# Altium PCB Power_Embedded_Board.PcbDoc (part 1 of 3)
Units mil, origin at the board's own origin, x right, y up, seen from the top; angles counter-clockwise.
Board outline 8055 x 2985 mil, 4 copper layers (Top Layer, Ground, Battery Voltage, Bottom Layer), stack 30.634 mil thick; 155 components, 174 nets, 698 pads, 170 vias.
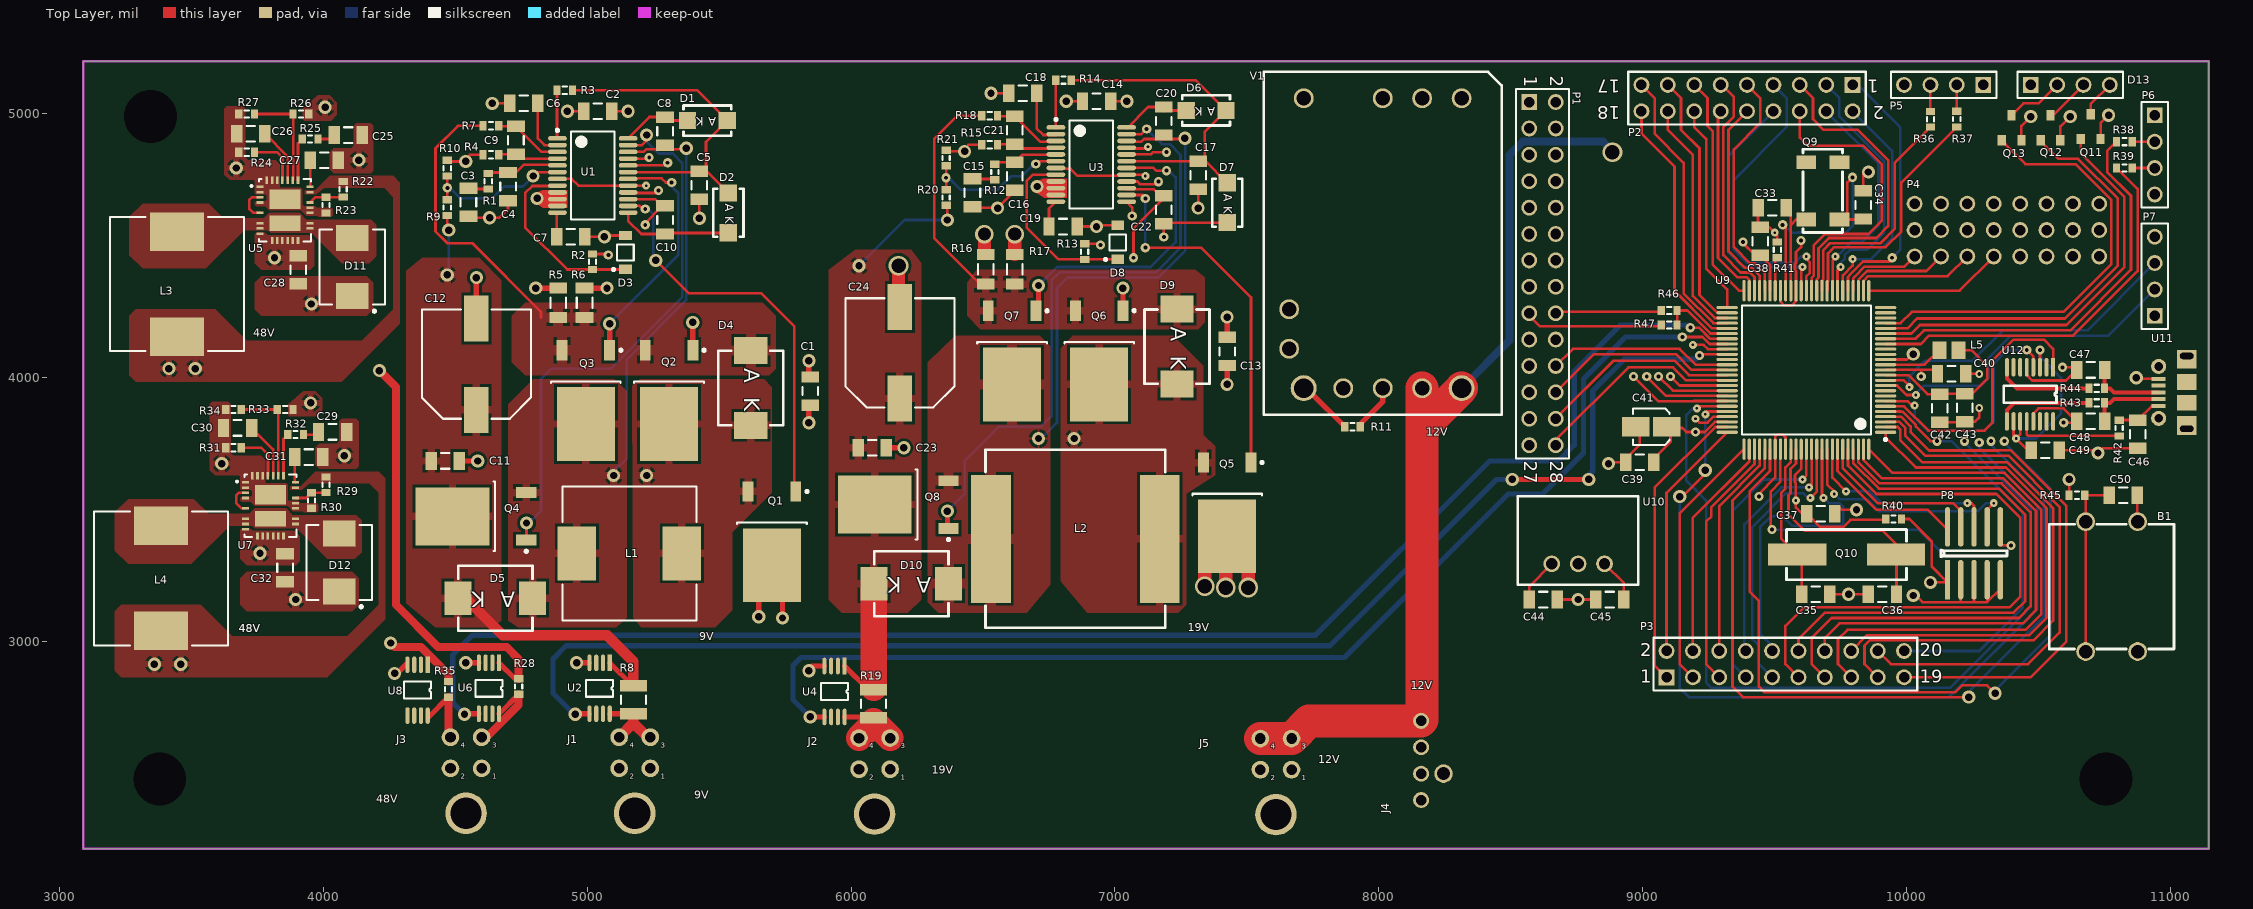
[diagram p0: Top Layer view]
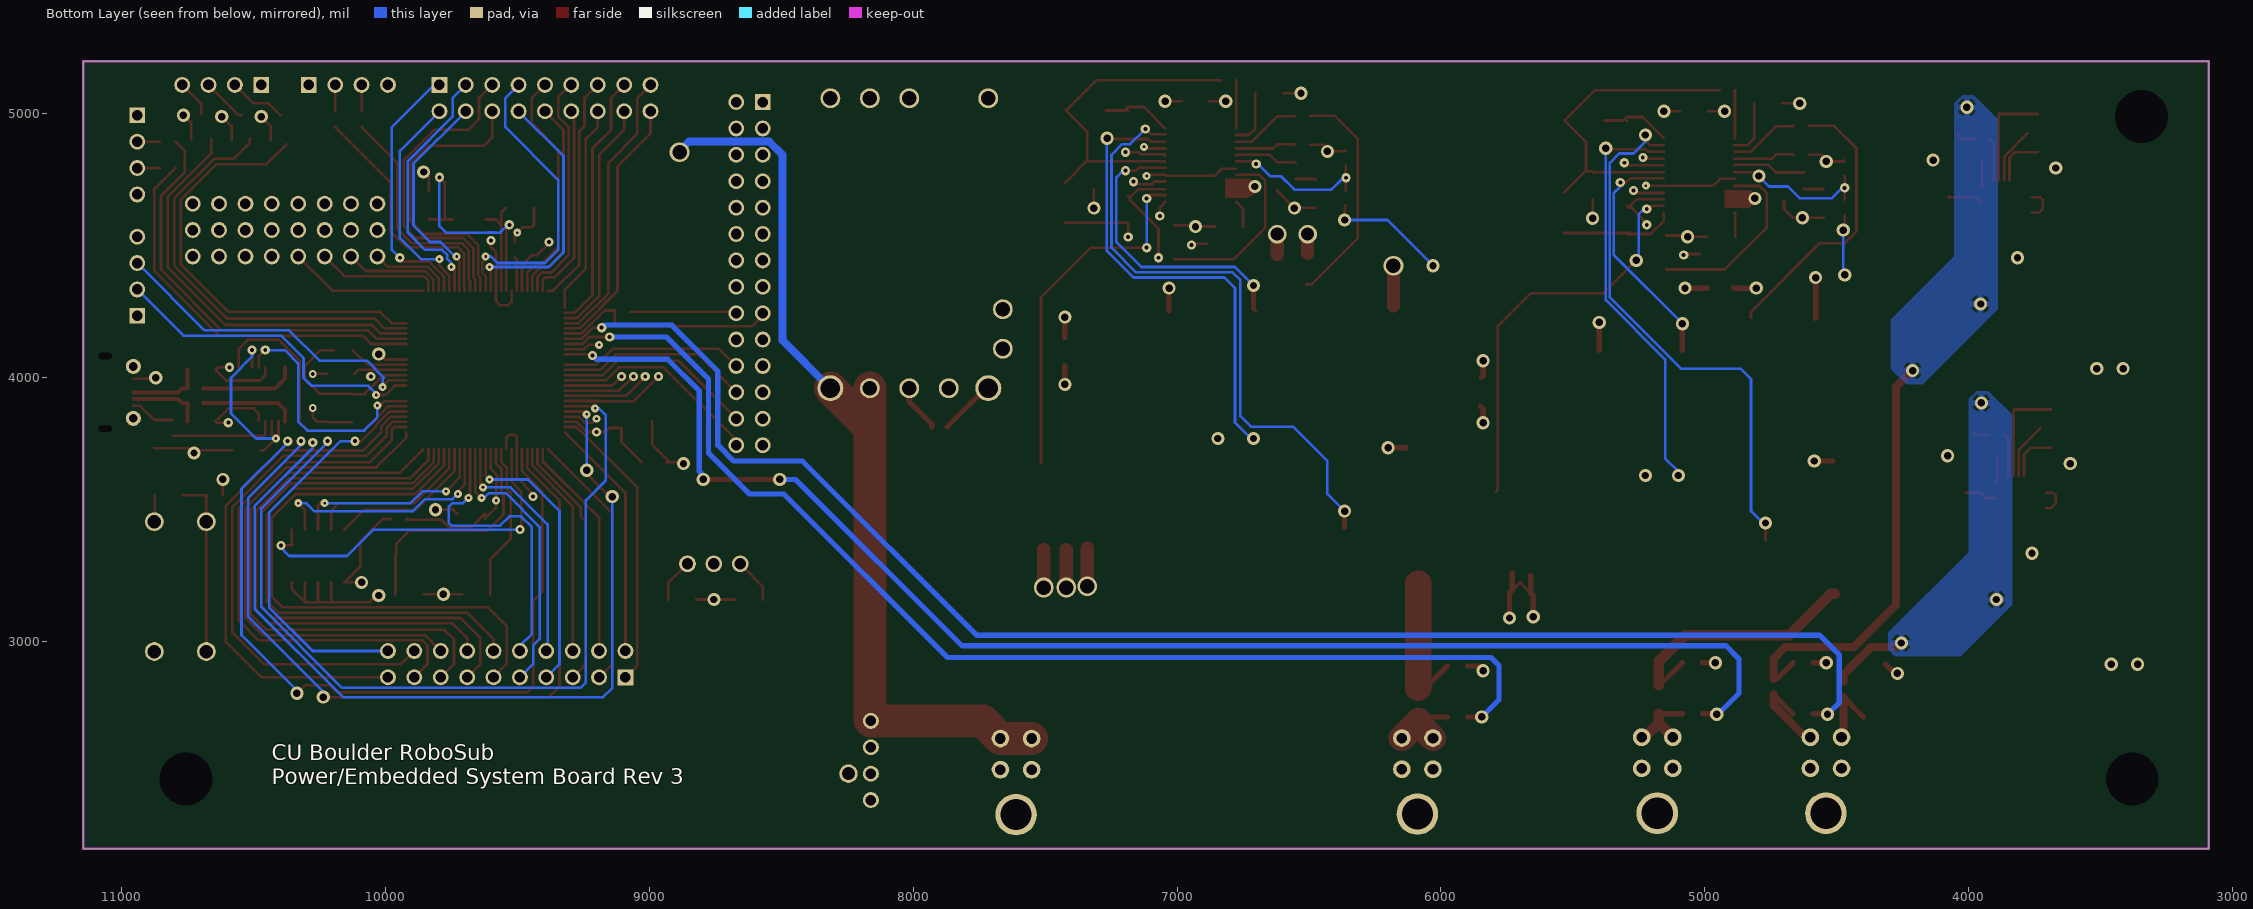
[diagram p1: Bottom Layer view, seen from below]
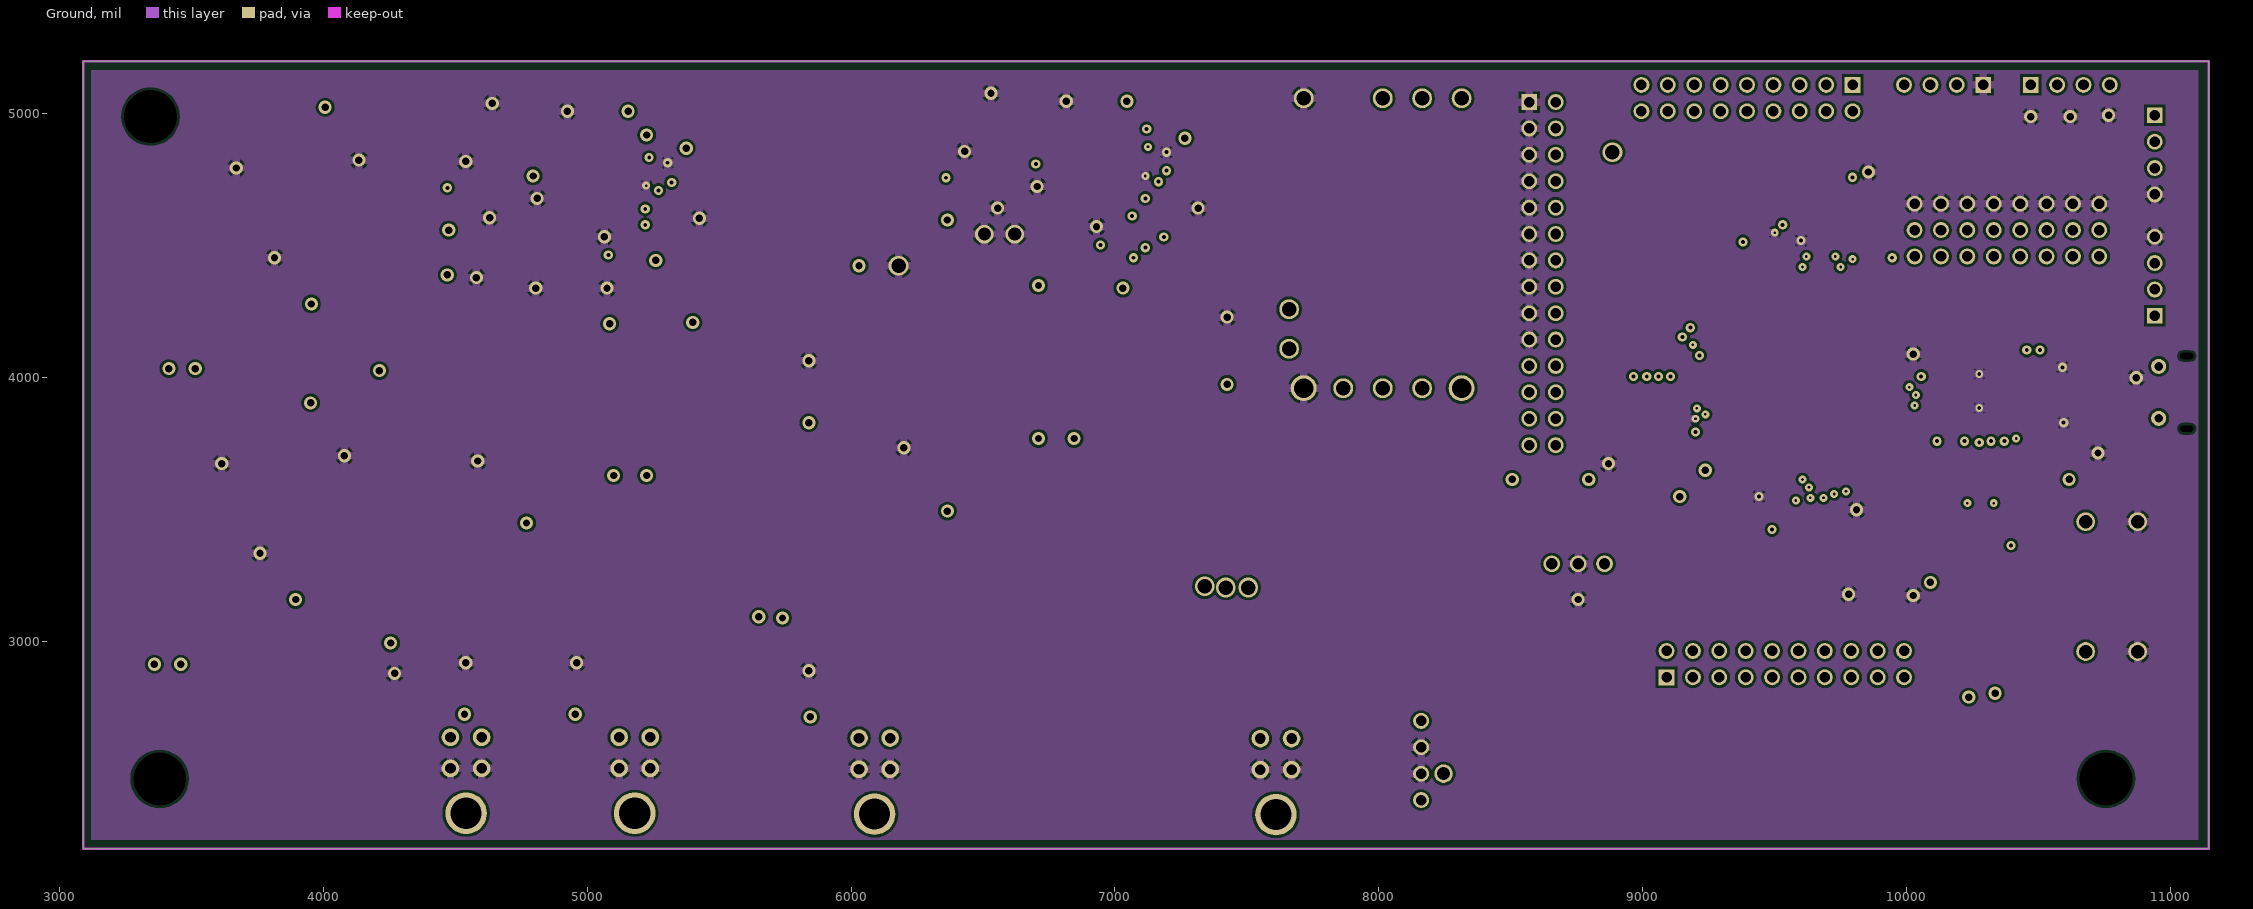
[diagram p2: Ground]
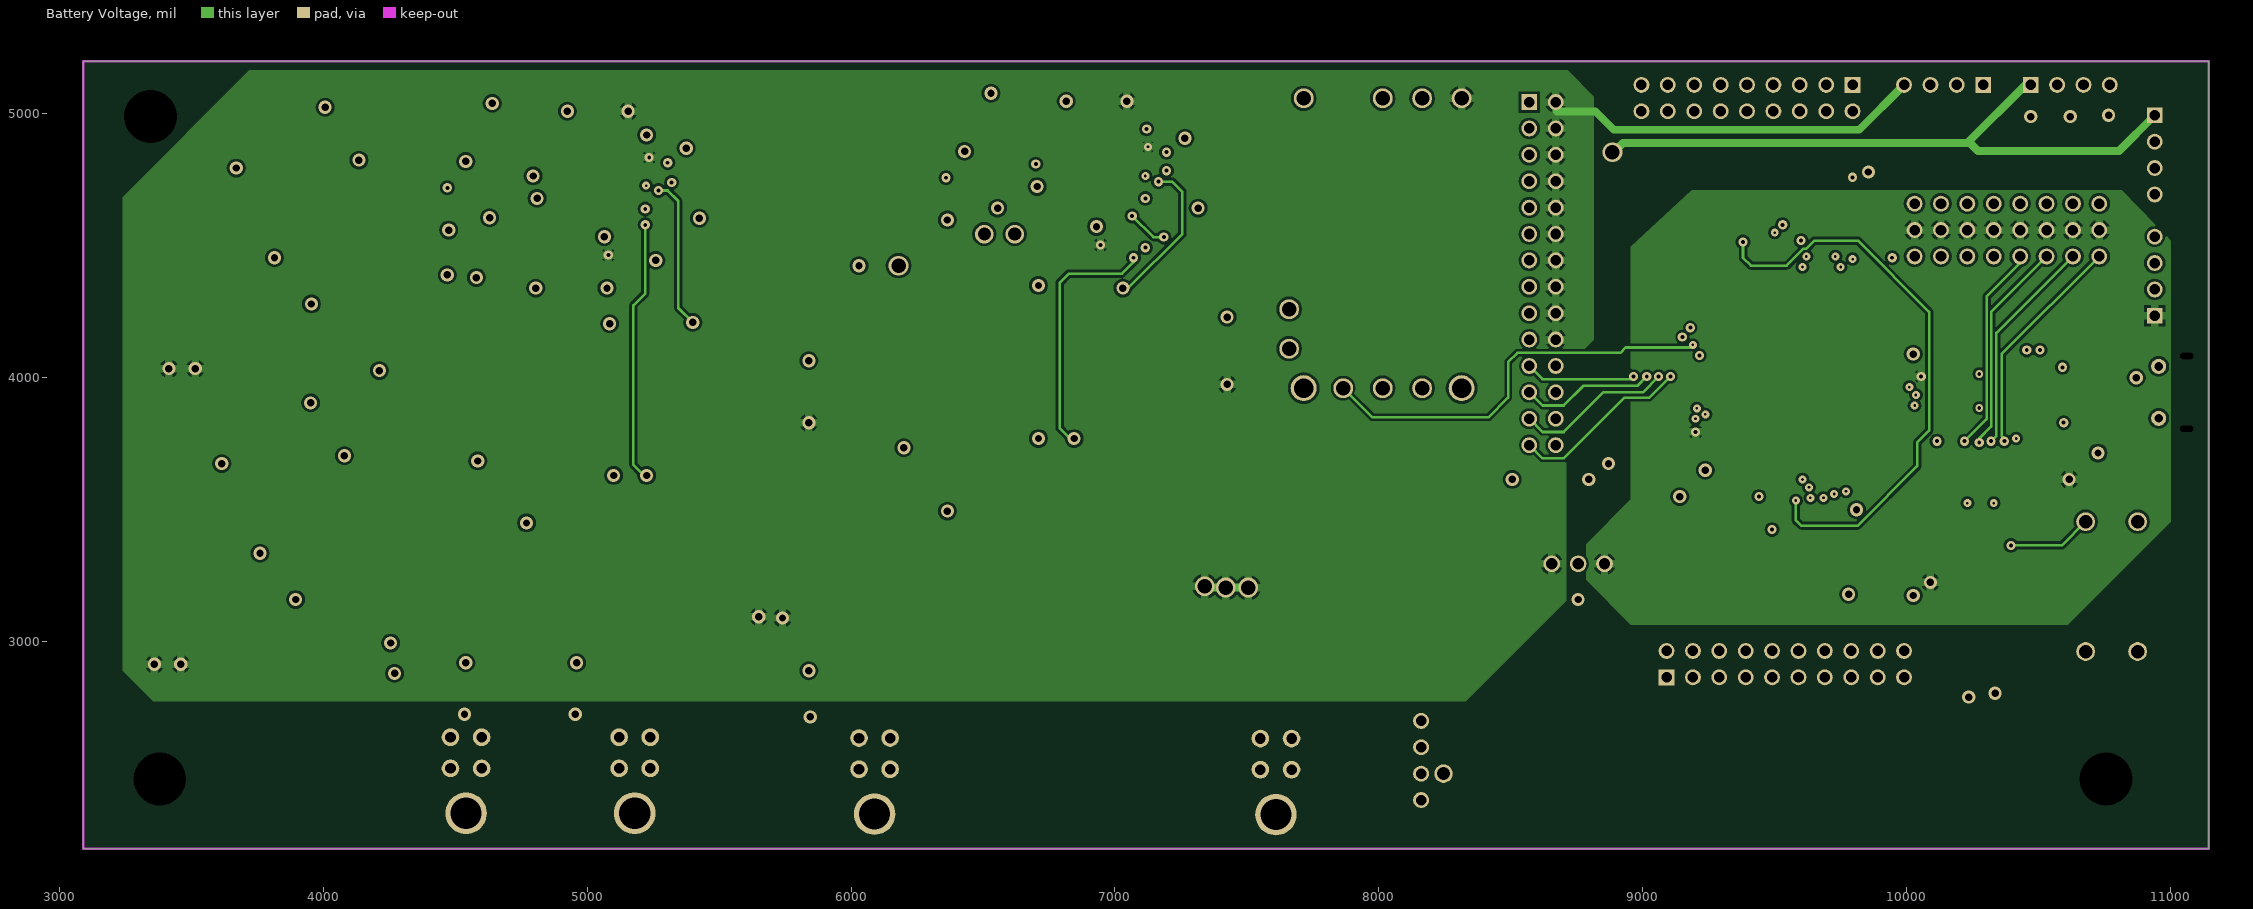
[diagram p3: Battery Voltage]

## Layer stack, top to bottom
Top Solder: solder mask 0.4, Solder Resist, Dk 3.5
Top Layer: signal copper 1.4
Dielectric 1: core 10, FR-4, Dk 4.2
Ground: signal copper 1.417
Dielectric 3: prepreg 5, Dk 4.2
Battery Voltage: signal copper 1.417
Dielectric 2: core 10, Dk 4.2
Bottom Layer: signal copper 1.4
Bottom Solder: solder mask 0.4, Solder Resist, Dk 3.5

## Board outline
3090,2215 11145,2215 11145,5200 3090,5200

## Design rules (kind name [scope] priority, off if disabled: settings)
Clearance Clearance_18 [InNamedPolygon('GND-GND')] p1: gap=10 ignorepadtopadclearanceinfootprint=FALSE except(0: Arc-Hole Track-Hole SMDPad-Hole THPad-Hole Via-Hole Text-Hole)
Clearance Clearance_14 [InNamedPolygon('NetC23_2-TopLayer') vs InNet('NetC23_2')] p2: gap=10 ignorepadtopadclearanceinfootprint=FALSE except(0: Arc-Fill Arc-Poly Arc-Region Arc-Hole Track-Fill Track-Poly Track-Region Track-Hole SMDPad-Hole THPad-Hole Via-Hole Fill-Hole Poly-Hole Region-Hole Text-Hole)
Clearance Clearance_12 [InNamedPolygon('NetC20_1-TopLayer')] p3: gap=10 ignorepadtopadclearanceinfootprint=FALSE except(0: Arc-Hole Track-Hole SMDPad-Hole THPad-Hole Via-Hole Fill-Hole Poly-Hole Region-Hole Text-Hole)
Clearance Clearance_11 [InNamedPolygon('NetD9_A-TopLayer')] p4: gap=10 ignorepadtopadclearanceinfootprint=FALSE except(0: Arc-Hole Track-Hole SMDPad-Hole THPad-Hole Via-Hole Fill-Hole Poly-Hole Region-Hole Text-Hole)
Clearance Clearance_10 [InNamedPolygon('NetD4_A-TopLayer') vs InNet('NetD4_A')] p5: gap=10 ignorepadtopadclearanceinfootprint=FALSE except(0: Arc-Fill Arc-Poly Arc-Region Arc-Hole Track-Fill Track-Poly Track-Region Track-Hole SMDPad-Hole THPad-Hole Via-Hole Fill-Hole Poly-Hole Region-Hole Text-Hole)
Clearance Clearance_9 [InNamedPolygon('NETC28_2_L01_P028') vs InNet('NetD8_1')] p6: gap=10 ignorepadtopadclearanceinfootprint=FALSE except(0: Arc-Arc Arc-Track Arc-Hole Track-Track Track-Hole SMDPad-Hole THPad-Hole Via-Hole Fill-Hole Poly-Hole Region-Hole Text-Hole)
Clearance Clearance_8 [InNamedPolygon('NetD4_A-TopLayer')] p7: gap=10 ignorepadtopadclearanceinfootprint=FALSE except(0: Arc-Hole Track-Hole SMDPad-Hole THPad-Hole Via-Hole Fill-Hole Poly-Hole Region-Hole Text-Hole)
Clearance Clearance_6 [InNamedPolygon('NetD4_A-TopLayer')] p8: gap=0 ignorepadtopadclearanceinfootprint=FALSE
Clearance Clearance_1 [InNamedPolygon('NetD4_A-TopLayer') or InNamedPolygon('NetC11_2-TopLayer') or InNamedPolygon('NetC8_1-TopLayer') or InNamedPolygon('NetC10_1-TopLayer') or InNamedPolygon('NetC22_1-TopLayer') or InNamedPolygon('NetC23_2-TopLayer') or InNamedPolygon('Vbat') or InNamedPolygon('3V3')] p9: gap=10 ignorepadtopadclearanceinfootprint=FALSE except(0: Arc-Hole Track-Hole SMDPad-Hole THPad-Hole Via-Hole Text-Hole)
Clearance [All] p10: gap=1 ignorepadtopadclearanceinfootprint=TRUE except(5: Arc-Arc Arc-Track Arc-SMDPad Arc-THPad Arc-Fill Arc-Poly Arc-Region Track-Track Track-SMDPad Track-THPad Track-Fill Track-Poly Track-Region; 8: Arc-Via Track-Via SMDPad-Via THPad-Via Via-Via Fill-Fill Fill-Poly Fill-Region Poly-Poly Poly-Region Region-Region)
DiffPairsRouting [All] p1: maxlimit=10 minlimit=10 mostfreqgap=10 toplayer_minwidth=15 toplayer_maxwidth=15 toplayer_prefwidth=15 midlayer1_minwidth=15 midlayer1_maxwidth=15 midlayer1_prefwidth=15 midlayer2_minwidth=15 midlayer2_maxwidth=15 midlayer2_prefwidth=15 bottomlayer_minwidth=15 bottomlayer_maxwidth=15 bottomlayer_prefwidth=15 maxuncoupledlength=500
HoleSize [All] p1: absolutevalues=TRUE maxlimit=200 minlimit=1 maxpercent=80.000 minpercent=20.000
MinimumAnnularRing [All] p1: minimumring=10
MinimumSolderMaskSliver [All] p1: minsoldermaskwidth=4.5
PolygonConnect PolygonConnect_43 [All vs IsNamedPolygon('NetC20_1-TopLayer')] p1: thpad.connectstyle=Relief thpad.reliefconductorwidth=10 thpad.reliefentries=4 thpad.polygonreliefangle="90 Angle" thpad.airgapwidth=10 smdpad.connectstyle=Relief smdpad.reliefconductorwidth=40 smdpad.reliefentries=4 smdpad.polygonreliefangle="90 Angle" smdpad.airgapwidth=10 via.connectstyle=Relief via.reliefconductorwidth=10 via.reliefentries=4 via.polygonreliefangle="90 Angle" via.airgapwidth=10
PolygonConnect PolygonConnect_42 [All vs IsNamedPolygon('NetD4_A-TopLayer')] p2: thpad.connectstyle=Relief thpad.reliefconductorwidth=10 thpad.reliefentries=4 thpad.polygonreliefangle="90 Angle" thpad.airgapwidth=10 smdpad.connectstyle=Relief smdpad.reliefconductorwidth=40 smdpad.reliefentries=4 smdpad.polygonreliefangle="90 Angle" smdpad.airgapwidth=10 via.connectstyle=Relief via.reliefconductorwidth=10 via.reliefentries=4 via.polygonreliefangle="90 Angle" via.airgapwidth=10
PolygonConnect PolygonConnect_41 [All vs IsNamedPolygon('NetD4_A-TopLayer')] p3: thpad.connectstyle=Relief thpad.reliefconductorwidth=10 thpad.reliefentries=4 thpad.polygonreliefangle="90 Angle" thpad.airgapwidth=10 smdpad.connectstyle=Relief smdpad.reliefconductorwidth=40 smdpad.reliefentries=4 smdpad.polygonreliefangle="90 Angle" smdpad.airgapwidth=10 via.connectstyle=Relief via.reliefconductorwidth=10 via.reliefentries=4 via.polygonreliefangle="90 Angle" via.airgapwidth=10
PolygonConnect PolygonConnect_40 [All vs IsNamedPolygon('GND-GND')] p4: thpad.connectstyle=Relief thpad.reliefconductorwidth=30 thpad.reliefentries=4 thpad.polygonreliefangle="90 Angle" thpad.airgapwidth=10 smdpad.connectstyle=Relief smdpad.reliefconductorwidth=10 smdpad.reliefentries=4 smdpad.polygonreliefangle="90 Angle" smdpad.airgapwidth=10 via.connectstyle=Relief via.reliefconductorwidth=30 via.reliefentries=4 via.polygonreliefangle="90 Angle" via.airgapwidth=10
PolygonConnect PolygonConnect_39 [All vs IsNamedPolygon('3V3')] p5: thpad.connectstyle=Relief thpad.reliefconductorwidth=30 thpad.reliefentries=4 thpad.polygonreliefangle="90 Angle" thpad.airgapwidth=10 smdpad.connectstyle=Relief smdpad.reliefconductorwidth=10 smdpad.reliefentries=4 smdpad.polygonreliefangle="90 Angle" smdpad.airgapwidth=10 via.connectstyle=Relief via.reliefconductorwidth=30 via.reliefentries=4 via.polygonreliefangle="90 Angle" via.airgapwidth=10
PolygonConnect PolygonConnect_38 [All vs IsNamedPolygon('Vbat')] p6: thpad.connectstyle=Relief thpad.reliefconductorwidth=30 thpad.reliefentries=4 thpad.polygonreliefangle="90 Angle" thpad.airgapwidth=10 smdpad.connectstyle=Relief smdpad.reliefconductorwidth=10 smdpad.reliefentries=4 smdpad.polygonreliefangle="90 Angle" smdpad.airgapwidth=10 via.connectstyle=Relief via.reliefconductorwidth=30 via.reliefentries=4 via.polygonreliefangle="90 Angle" via.airgapwidth=10
PolygonConnect PolygonConnect_37 [All vs IsNamedPolygon('Vbat')] p7: thpad.connectstyle=Relief thpad.reliefconductorwidth=10 thpad.reliefentries=4 thpad.polygonreliefangle="90 Angle" thpad.airgapwidth=10 smdpad.connectstyle=Relief smdpad.reliefconductorwidth=10 smdpad.reliefentries=4 smdpad.polygonreliefangle="90 Angle" smdpad.airgapwidth=10 via.connectstyle=Relief via.reliefconductorwidth=30 via.reliefentries=4 via.polygonreliefangle="90 Angle" via.airgapwidth=10
PolygonConnect PolygonConnect_36 [All vs IsNamedPolygon('NETC32_2_L01_P029')] p8: thpad.connectstyle=Relief thpad.reliefconductorwidth=10 thpad.reliefentries=4 thpad.polygonreliefangle="90 Angle" thpad.airgapwidth=10 smdpad.connectstyle=Direct smdpad.reliefconductorwidth=10 smdpad.reliefentries=4 smdpad.polygonreliefangle="90 Angle" smdpad.airgapwidth=10 via.connectstyle=Relief via.reliefconductorwidth=30 via.reliefentries=4 via.polygonreliefangle="90 Angle" via.airgapwidth=10
PolygonConnect PolygonConnect_35 [All vs IsNamedPolygon('NETC28_2_L01_P028')] p9: thpad.connectstyle=Relief thpad.reliefconductorwidth=10 thpad.reliefentries=4 thpad.polygonreliefangle="90 Angle" thpad.airgapwidth=10 smdpad.connectstyle=Direct smdpad.reliefconductorwidth=10 smdpad.reliefentries=4 smdpad.polygonreliefangle="90 Angle" smdpad.airgapwidth=10 via.connectstyle=Relief via.reliefconductorwidth=30 via.reliefentries=4 via.polygonreliefangle="90 Angle" via.airgapwidth=10
PolygonConnect PolygonConnect_34 [All vs IsNamedPolygon('NETC32_2_L01_P029')] p10: thpad.connectstyle=Relief thpad.reliefconductorwidth=10 thpad.reliefentries=4 thpad.polygonreliefangle="90 Angle" thpad.airgapwidth=10 smdpad.connectstyle=Direct smdpad.reliefconductorwidth=10 smdpad.reliefentries=4 smdpad.polygonreliefangle="90 Angle" smdpad.airgapwidth=10 via.connectstyle=Relief via.reliefconductorwidth=30 via.reliefentries=4 via.polygonreliefangle="90 Angle" via.airgapwidth=10
PolygonConnect PolygonConnect_33 [All vs IsNamedPolygon('NETC28_2_L01_P028')] p11: thpad.connectstyle=Relief thpad.reliefconductorwidth=10 thpad.reliefentries=4 thpad.polygonreliefangle="90 Angle" thpad.airgapwidth=10 smdpad.connectstyle=Direct smdpad.reliefconductorwidth=10 smdpad.reliefentries=4 smdpad.polygonreliefangle="90 Angle" smdpad.airgapwidth=10 via.connectstyle=Relief via.reliefconductorwidth=30 via.reliefentries=4 via.polygonreliefangle="90 Angle" via.airgapwidth=10
PolygonConnect PolygonConnect_32 [All vs IsNamedPolygon('NETC28_2_L01_P028')] p12: thpad.connectstyle=Relief thpad.reliefconductorwidth=10 thpad.reliefentries=4 thpad.polygonreliefangle="90 Angle" thpad.airgapwidth=10 smdpad.connectstyle=Direct smdpad.reliefconductorwidth=10 smdpad.reliefentries=4 smdpad.polygonreliefangle="90 Angle" smdpad.airgapwidth=10 via.connectstyle=Relief via.reliefconductorwidth=20 via.reliefentries=4 via.polygonreliefangle="90 Angle" via.airgapwidth=10
PolygonConnect PolygonConnect_31 [All vs IsNamedPolygon('NetC22_1-TopLayer')] p13: thpad.connectstyle=Relief thpad.reliefconductorwidth=10 thpad.reliefentries=4 thpad.polygonreliefangle="90 Angle" thpad.airgapwidth=10 smdpad.connectstyle=Relief smdpad.reliefconductorwidth=30 smdpad.reliefentries=4 smdpad.polygonreliefangle="90 Angle" smdpad.airgapwidth=10 via.connectstyle=Relief via.reliefconductorwidth=30 via.reliefentries=4 via.polygonreliefangle="90 Angle" via.airgapwidth=10
PolygonConnect PolygonConnect_30 [All vs IsNamedPolygon('NetC20_1-TopLayer')] p14: thpad.connectstyle=Relief thpad.reliefconductorwidth=10 thpad.reliefentries=4 thpad.polygonreliefangle="90 Angle" thpad.airgapwidth=10 smdpad.connectstyle=Relief smdpad.reliefconductorwidth=30 smdpad.reliefentries=4 smdpad.polygonreliefangle="90 Angle" smdpad.airgapwidth=10 via.connectstyle=Relief via.reliefconductorwidth=30 via.reliefentries=4 via.polygonreliefangle="90 Angle" via.airgapwidth=10
PolygonConnect PolygonConnect_29 [All vs IsNamedPolygon('NETC28_2_L01_P028')] p15: thpad.connectstyle=Relief thpad.reliefconductorwidth=10 thpad.reliefentries=4 thpad.polygonreliefangle="90 Angle" thpad.airgapwidth=10 smdpad.connectstyle=Relief smdpad.reliefconductorwidth=30 smdpad.reliefentries=4 smdpad.polygonreliefangle="90 Angle" smdpad.airgapwidth=10 via.connectstyle=Relief via.reliefconductorwidth=30 via.reliefentries=4 via.polygonreliefangle="90 Angle" via.airgapwidth=10
PolygonConnect PolygonConnect_28 [All vs IsNamedPolygon('NetD9_A-TopLayer')] p16: thpad.connectstyle=Relief thpad.reliefconductorwidth=10 thpad.reliefentries=4 thpad.polygonreliefangle="90 Angle" thpad.airgapwidth=10 smdpad.connectstyle=Relief smdpad.reliefconductorwidth=30 smdpad.reliefentries=4 smdpad.polygonreliefangle="90 Angle" smdpad.airgapwidth=10 via.connectstyle=Relief via.reliefconductorwidth=30 via.reliefentries=4 via.polygonreliefangle="90 Angle" via.airgapwidth=10
PolygonConnect PolygonConnect_27 [All vs IsNamedPolygon('NetC23_2-TopLayer')] p17: thpad.connectstyle=Relief thpad.reliefconductorwidth=10 thpad.reliefentries=4 thpad.polygonreliefangle="90 Angle" thpad.airgapwidth=10 smdpad.connectstyle=Relief smdpad.reliefconductorwidth=30 smdpad.reliefentries=4 smdpad.polygonreliefangle="90 Angle" smdpad.airgapwidth=10 via.connectstyle=Relief via.reliefconductorwidth=30 via.reliefentries=4 via.polygonreliefangle="90 Angle" via.airgapwidth=10
PolygonConnect PolygonConnect_26 [All vs IsNamedPolygon('NetC10_1-TopLayer')] p18: thpad.connectstyle=Relief thpad.reliefconductorwidth=10 thpad.reliefentries=4 thpad.polygonreliefangle="90 Angle" thpad.airgapwidth=10 smdpad.connectstyle=Relief smdpad.reliefconductorwidth=30 smdpad.reliefentries=4 smdpad.polygonreliefangle="90 Angle" smdpad.airgapwidth=10 via.connectstyle=Relief via.reliefconductorwidth=30 via.reliefentries=4 via.polygonreliefangle="90 Angle" via.airgapwidth=10
PolygonConnect PolygonConnect_25 [All vs IsNamedPolygon('NetC8_1-TopLayer')] p19: thpad.connectstyle=Relief thpad.reliefconductorwidth=10 thpad.reliefentries=4 thpad.polygonreliefangle="90 Angle" thpad.airgapwidth=10 smdpad.connectstyle=Relief smdpad.reliefconductorwidth=30 smdpad.reliefentries=4 smdpad.polygonreliefangle="90 Angle" smdpad.airgapwidth=10 via.connectstyle=Relief via.reliefconductorwidth=30 via.reliefentries=4 via.polygonreliefangle="90 Angle" via.airgapwidth=10
PolygonConnect PolygonConnect_24 [All vs IsNamedPolygon('NetC8_1-TopLayer')] p20: thpad.connectstyle=Relief thpad.reliefconductorwidth=10 thpad.reliefentries=4 thpad.polygonreliefangle="90 Angle" thpad.airgapwidth=10 smdpad.connectstyle=Relief smdpad.reliefconductorwidth=10 smdpad.reliefentries=4 smdpad.polygonreliefangle="90 Angle" smdpad.airgapwidth=30 via.connectstyle=Relief via.reliefconductorwidth=10 via.reliefentries=4 via.polygonreliefangle="90 Angle" via.airgapwidth=30
PolygonConnect PolygonConnect_23 [All vs IsNamedPolygon('NetC11_2-TopLayer')] p21: thpad.connectstyle=Relief thpad.reliefconductorwidth=10 thpad.reliefentries=4 thpad.polygonreliefangle="90 Angle" thpad.airgapwidth=10 smdpad.connectstyle=Relief smdpad.reliefconductorwidth=30 smdpad.reliefentries=4 smdpad.polygonreliefangle="90 Angle" smdpad.airgapwidth=10 via.connectstyle=Relief via.reliefconductorwidth=30 via.reliefentries=4 via.polygonreliefangle="90 Angle" via.airgapwidth=10
PolygonConnect PolygonConnect_22 [All vs IsNamedPolygon('NetC11_2-TopLayer')] p22: thpad.connectstyle=Relief thpad.reliefconductorwidth=10 thpad.reliefentries=4 thpad.polygonreliefangle="90 Angle" thpad.airgapwidth=10 smdpad.connectstyle=Relief smdpad.reliefconductorwidth=20 smdpad.reliefentries=4 smdpad.polygonreliefangle="90 Angle" smdpad.airgapwidth=10 via.connectstyle=Relief via.reliefconductorwidth=20 via.reliefentries=4 via.polygonreliefangle="90 Angle" via.airgapwidth=10
PolygonConnect PolygonConnect_21 [All vs IsNamedPolygon('NetD4_A-TopLayer')] p23: thpad.connectstyle=Relief thpad.reliefconductorwidth=10 thpad.reliefentries=4 thpad.polygonreliefangle="90 Angle" thpad.airgapwidth=10 smdpad.connectstyle=Relief smdpad.reliefconductorwidth=20 smdpad.reliefentries=4 smdpad.polygonreliefangle="90 Angle" smdpad.airgapwidth=10 via.connectstyle=Relief via.reliefconductorwidth=10 via.reliefentries=4 via.polygonreliefangle="90 Angle" via.airgapwidth=10
PolygonConnect PolygonConnect_20 [All vs IsNamedPolygon('NETD4_A_L01_P037')] p24: connectstyle=Relief reliefconductorwidth=10 reliefentries=4 polygonreliefangle="90 Angle" airgapwidth=10
PolygonConnect PolygonConnect_19 [All vs IsNamedPolygon('NETC28_2_L01_P028')] p25: connectstyle=Relief reliefconductorwidth=10 reliefentries=4 polygonreliefangle="90 Angle" airgapwidth=10
PolygonConnect PolygonConnect_18 [All] p26: thpad.connectstyle=Relief thpad.reliefconductorwidth=10 thpad.reliefentries=4 thpad.polygonreliefangle="90 Angle" thpad.airgapwidth=10 smdpad.connectstyle=Direct smdpad.reliefconductorwidth=10 smdpad.reliefentries=4 smdpad.polygonreliefangle="90 Angle" smdpad.airgapwidth=10 via.connectstyle=Relief via.reliefconductorwidth=25 via.reliefentries=4 via.polygonreliefangle="90 Angle" via.airgapwidth=10
PolygonConnect PolygonConnect_17 [All vs IsNamedPolygon('NETC32_2_L01_P012')] p27: thpad.connectstyle=Relief thpad.reliefconductorwidth=10 thpad.reliefentries=4 thpad.polygonreliefangle="90 Angle" thpad.airgapwidth=10 smdpad.connectstyle=Direct smdpad.reliefconductorwidth=10 smdpad.reliefentries=4 smdpad.polygonreliefangle="90 Angle" smdpad.airgapwidth=10 via.connectstyle=Relief via.reliefconductorwidth=10 via.reliefentries=4 via.polygonreliefangle="90 Angle" via.airgapwidth=10
PolygonConnect PolygonConnect_16 [All vs IsNamedPolygon('NETC28_2_L01_P020')] p28: thpad.connectstyle=Relief thpad.reliefconductorwidth=10 thpad.reliefentries=4 thpad.polygonreliefangle="90 Angle" thpad.airgapwidth=10 smdpad.connectstyle=Direct smdpad.reliefconductorwidth=10 smdpad.reliefentries=4 smdpad.polygonreliefangle="90 Angle" smdpad.airgapwidth=10 via.connectstyle=Relief via.reliefconductorwidth=20 via.reliefentries=4 via.polygonreliefangle="90 Angle" via.airgapwidth=10
PolygonConnect PolygonConnect_15 [All vs IsNamedPolygon('NETC32_2_L01_P012')] p29: thpad.connectstyle=Relief thpad.reliefconductorwidth=10 thpad.reliefentries=4 thpad.polygonreliefangle="90 Angle" thpad.airgapwidth=10 smdpad.connectstyle=Direct smdpad.reliefconductorwidth=10 smdpad.reliefentries=4 smdpad.polygonreliefangle="90 Angle" smdpad.airgapwidth=10 via.connectstyle=Relief via.reliefconductorwidth=20 via.reliefentries=4 via.polygonreliefangle="90 Angle" via.airgapwidth=10
PolygonConnect PolygonConnect_14 [All vs IsNamedPolygon('NETC28_2_L01_P020')] p30: thpad.connectstyle=Relief thpad.reliefconductorwidth=10 thpad.reliefentries=4 thpad.polygonreliefangle="90 Angle" thpad.airgapwidth=10 smdpad.connectstyle=Direct smdpad.reliefconductorwidth=10 smdpad.reliefentries=4 smdpad.polygonreliefangle="90 Angle" smdpad.airgapwidth=10 via.connectstyle=Relief via.reliefconductorwidth=10 via.reliefentries=4 via.polygonreliefangle="90 Angle" via.airgapwidth=10
PolygonConnect PolygonConnect_13 [All vs IsNamedPolygon('Top Layer-GND3')] p31: thpad.connectstyle=Relief thpad.reliefconductorwidth=10 thpad.reliefentries=4 thpad.polygonreliefangle="90 Angle" thpad.airgapwidth=10 smdpad.connectstyle=Direct smdpad.reliefconductorwidth=10 smdpad.reliefentries=4 smdpad.polygonreliefangle="90 Angle" smdpad.airgapwidth=10 via.connectstyle=Relief via.reliefconductorwidth=10 via.reliefentries=4 via.polygonreliefangle="90 Angle" via.airgapwidth=10
PolygonConnect PolygonConnect_12 [All vs IsNamedPolygon('Top Layer-GND2')] p32: thpad.connectstyle=Relief thpad.reliefconductorwidth=10 thpad.reliefentries=4 thpad.polygonreliefangle="90 Angle" thpad.airgapwidth=10 smdpad.connectstyle=Direct smdpad.reliefconductorwidth=10 smdpad.reliefentries=4 smdpad.polygonreliefangle="90 Angle" smdpad.airgapwidth=10 via.connectstyle=Relief via.reliefconductorwidth=10 via.reliefentries=4 via.polygonreliefangle="90 Angle" via.airgapwidth=10
PolygonConnect PolygonConnect_11 [All vs IsNamedPolygon('Top Layer-GND1')] p33: thpad.connectstyle=Relief thpad.reliefconductorwidth=10 thpad.reliefentries=4 thpad.polygonreliefangle="90 Angle" thpad.airgapwidth=10 smdpad.connectstyle=Direct smdpad.reliefconductorwidth=10 smdpad.reliefentries=4 smdpad.polygonreliefangle="90 Angle" smdpad.airgapwidth=10 via.connectstyle=Relief via.reliefconductorwidth=10 via.reliefentries=4 via.polygonreliefangle="90 Angle" via.airgapwidth=10
PolygonConnect PolygonConnect_10 [All vs IsNamedPolygon('Top Layer-GND1')] p34: thpad.connectstyle=Relief thpad.reliefconductorwidth=10 thpad.reliefentries=4 thpad.polygonreliefangle="90 Angle" thpad.airgapwidth=10 smdpad.connectstyle=Direct smdpad.reliefconductorwidth=10 smdpad.reliefentries=4 smdpad.polygonreliefangle="90 Angle" smdpad.airgapwidth=10 via.connectstyle=Relief via.reliefconductorwidth=10 via.reliefentries=4 via.polygonreliefangle="90 Angle" via.airgapwidth=10
PolygonConnect PolygonConnect_9 [All vs IsNamedPolygon('Top Layer-GND1')] p35: thpad.connectstyle=Relief thpad.reliefconductorwidth=10 thpad.reliefentries=4 thpad.polygonreliefangle="90 Angle" thpad.airgapwidth=10 smdpad.connectstyle=Direct smdpad.reliefconductorwidth=10 smdpad.reliefentries=4 smdpad.polygonreliefangle="90 Angle" smdpad.airgapwidth=10 via.connectstyle=Relief via.reliefconductorwidth=10 via.reliefentries=4 via.polygonreliefangle="90 Angle" via.airgapwidth=10
PolygonConnect PolygonConnect_8 [All vs IsNamedPolygon('NETC32_2_L01_P012')] p36: thpad.connectstyle=Relief thpad.reliefconductorwidth=10 thpad.reliefentries=4 thpad.polygonreliefangle="90 Angle" thpad.airgapwidth=10 smdpad.connectstyle=Direct smdpad.reliefconductorwidth=10 smdpad.reliefentries=4 smdpad.polygonreliefangle="90 Angle" smdpad.airgapwidth=10 via.connectstyle=Relief via.reliefconductorwidth=10 via.reliefentries=4 via.polygonreliefangle="90 Angle" via.airgapwidth=10
PolygonConnect PolygonConnect_7 [All vs IsNamedPolygon('NETC32_2_L01_P012')] p37: thpad.connectstyle=Relief thpad.reliefconductorwidth=10 thpad.reliefentries=4 thpad.polygonreliefangle="90 Angle" thpad.airgapwidth=10 smdpad.connectstyle=Direct smdpad.reliefconductorwidth=10 smdpad.reliefentries=4 smdpad.polygonreliefangle="90 Angle" smdpad.airgapwidth=10 via.connectstyle=Relief via.reliefconductorwidth=10 via.reliefentries=4 via.polygonreliefangle="90 Angle" via.airgapwidth=10
PolygonConnect PolygonConnect_6 [All vs IsNamedPolygon('NETC32_2_L01_P012')] p38: thpad.connectstyle=Relief thpad.reliefconductorwidth=10 thpad.reliefentries=4 thpad.polygonreliefangle="90 Angle" thpad.airgapwidth=10 smdpad.connectstyle=Direct smdpad.reliefconductorwidth=10 smdpad.reliefentries=4 smdpad.polygonreliefangle="90 Angle" smdpad.airgapwidth=10 via.connectstyle=Relief via.reliefconductorwidth=10 via.reliefentries=4 via.polygonreliefangle="90 Angle" via.airgapwidth=10
PolygonConnect PolygonConnect_5 [All vs IsNamedPolygon('NETC32_2_L01_P012')] p39: thpad.connectstyle=Relief thpad.reliefconductorwidth=10 thpad.reliefentries=4 thpad.polygonreliefangle="90 Angle" thpad.airgapwidth=10 smdpad.connectstyle=Direct smdpad.reliefconductorwidth=10 smdpad.reliefentries=4 smdpad.polygonreliefangle="90 Angle" smdpad.airgapwidth=10 via.connectstyle=Direct via.reliefconductorwidth=10 via.reliefentries=4 via.polygonreliefangle="90 Angle" via.airgapwidth=10
PolygonConnect PolygonConnect_4 [All vs IsNamedPolygon('NETD12_1_L01_P004')] p40: thpad.connectstyle=Relief thpad.reliefconductorwidth=10 thpad.reliefentries=4 thpad.polygonreliefangle="90 Angle" thpad.airgapwidth=10 smdpad.connectstyle=Direct smdpad.reliefconductorwidth=10 smdpad.reliefentries=4 smdpad.polygonreliefangle="90 Angle" smdpad.airgapwidth=10 via.connectstyle=Direct via.reliefconductorwidth=10 via.reliefentries=4 via.polygonreliefangle="90 Angle" via.airgapwidth=10
PolygonConnect PolygonConnect_3 [All vs IsNamedPolygon('NETD11_1_L01_P000')] p41: thpad.connectstyle=Relief thpad.reliefconductorwidth=10 thpad.reliefentries=4 thpad.polygonreliefangle="90 Angle" thpad.airgapwidth=10 smdpad.connectstyle=Direct smdpad.reliefconductorwidth=10 smdpad.reliefentries=4 smdpad.polygonreliefangle="90 Angle" smdpad.airgapwidth=10 via.connectstyle=Direct via.reliefconductorwidth=10 via.reliefentries=4 via.polygonreliefangle="90 Angle" via.airgapwidth=10
PolygonConnect PolygonConnect_2 [All vs IsNamedPolygon('NETD11_1_L01_P000')] p42: thpad.connectstyle=Relief thpad.reliefconductorwidth=10 thpad.reliefentries=4 thpad.polygonreliefangle="90 Angle" thpad.airgapwidth=10 smdpad.connectstyle=Direct smdpad.reliefconductorwidth=10 smdpad.reliefentries=4 smdpad.polygonreliefangle="90 Angle" smdpad.airgapwidth=10 via.connectstyle=Relief via.reliefconductorwidth=10 via.reliefentries=4 via.polygonreliefangle="90 Angle" via.airgapwidth=10
PolygonConnect PolygonConnect_1 [All vs IsNamedPolygon('NETD11_1_L01_P000')] p43: thpad.connectstyle=Relief thpad.reliefconductorwidth=10 thpad.reliefentries=4 thpad.polygonreliefangle="90 Angle" thpad.airgapwidth=10 smdpad.connectstyle=Direct smdpad.reliefconductorwidth=10 smdpad.reliefentries=4 smdpad.polygonreliefangle="90 Angle" smdpad.airgapwidth=10 via.connectstyle=Relief via.reliefconductorwidth=10 via.reliefentries=4 via.polygonreliefangle="90 Angle" via.airgapwidth=10
PolygonConnect [All] p44: connectstyle=Relief reliefconductorwidth=10 reliefentries=4 polygonreliefangle="90 Angle" airgapwidth=10
RoutingVias [All] p1: holewidth=28 width=50 viastyle="Through Hole" minholewidth=10 minwidth=30 maxholewidth=30 maxwidth=75
SilkToSilkClearance [All] p1: silktosilkclearance=0
SilkToSolderMaskClearance [IsPad] p1: minsilkscreentomaskgap=1 clearancetoexposedcopper=TRUE
SolderMaskExpansion [All] p1: expansion=2.5
UnpouredPolygon UnpouredPolygon_1 [All] p1:
UnpouredPolygon [All] p2:
Width [All] p1: maxlimit=200 minlimit=10 preferedwidth=10
24 further rules are at their usual default settings.

## Classes and differential pairs
component class "9V Converter": C1 C2 C3 C4 C5 C6 C7 C8 C9 C10 C11 C12 D1 D2 D3 D4 D5 L1 Q1 Q2 Q3 Q4 R1 R2 R3 R4 R5 R6 R7 R8 R9 R10 U1 U2
component class "12V Conterter": R11 V1
component class "19V Converter": C13 C14 C15 C16 C17 C18 C19 C20 C21 C22 C23 C24 D6 D7 D8 D9 D10 L2 Q5 Q6 Q7 Q8 R12 R13 R14 R15 R16 R17 R18 R19 R20 R21 U3 U4
component class "48V Converter": C25 C26 C27 C28 D11 L3 R22 R23 R24 R25 R26 R27 R28 U5 U6
component class Embedded_Chip: C33 C34 C35 C36 C37 C38 C39 C40 C41 C42 C43 L5 Q9 Q10 R40 R41 R46 R47 U9
component class "Embedded Circuits": B1 C44 C45 C46 C47 C48 C49 C50 D13 P8 Q11 Q12 Q13 R42 R43 R44 R45 U10 U11 U12
component class "Embedded System": P2 P3 P4 P5 P6 P7 R36 R37 R38 R39
component class Power_Embedded_Board_Top: J1 J2 J3 J4 J5 P1
component class "48V Converter": C29 C30 C31 C32 D12 L4 R29 R30 R31 R32 R33 R34 R35 U7 U8
differential pair USBData: +USBData_P -USBData_N
differential pair USBD: +USBD_P -USBD_N

## Components (designator, comment, footprint, x,y, rotation, side; value= is the part's Value field where it differs from the comment)
B1 "Push Button" "PUSH BUTTON" 10875,2962.87 r90 top
C1 "Cap Semi" C1206 5845,3950 r270 top value=22u
C2 "Cap Semi" C1206 5040,5010 r0 top value=3.3u
C3 "Cap Semi" C1206 4550,4665 r90 top value=0.01u
C4 "Cap Semi" C1206 4700,4725 r90 top value=100p
C5 "Cap Semi" C1206 5425,4730 r90 top value=4.7u
C6 "Cap Semi" C1206 4760,5040 r0 top value=0.001u
C7 "Cap Semi" C1206 4938.15,4535 r180 top value=0.001u
C8 "Cap Semi" C1206 5295,4935 r90 top value=0.22u
C9 "Cap Semi" C1206 4730,4900 r90 top value=100p
C10 "Cap Semi" C1206 5295,4598.15 r270 top value=0.22u
C11 "Cap Semi" C1206 4461.85,3685 r180 top value=22u
C12 "390uF" PCVXXXXXMCLXGS 4580,4051.77 r90 top
C13 "Cap Semi" C1206 7425,4100 r270 top value=22u
C14 "Cap Semi" C1206 6930,5048.23 r0 top value=3.3u
C15 "Cap Semi" C1206 6460,4701.38 r90 top value=0.01u
C16 "Cap Semi" C1206 6620,4763.23 r90 top value=100p
C17 "Cap Semi" C1206 7315,4768.23 r90 top value=4.7u
C18 "Cap Semi" C1206 6650,5078.23 r0 top value=0.001u
C19 "Cap Semi" C1206 6803.15,4573.23 r180 top value=0.001u
C20 "Cap Semi" C1206 7185,4973.23 r90 top value=0.22u
C21 "Cap Semi" C1206 6620,4938.23 r90 top value=100p
C22 "Cap Semi" C1206 7185,4636.38 r270 top value=0.22u
C23 "Cap Semi" C1206 6080,3735 r180 top value=22u
C24 "390uF" PCVXXXXXMCLXGS 6185,4095 r90 top
C25 "Cap Semi" C1206 4095,4920 r180 top value=0.01u
C26 "Cap Semi" C1206 3725,4925 r0 top value=0.01u
C27 "Cap Semi" C1206 4003.15,4825 r180 top value=4.7u
C28 "Cap Semi" C1206 3905,4410 r270 top value=10u
C29 "Cap Semi" C1206 4035,3795 r180 top value=0.01u
C30 "Cap Semi" C1206 3675,3810 r0 top value=0.01u
C31 "Cap Semi" C1206 3945,3700 r180 top value=4.7u
C32 "Cap Semi" C1206 3855,3280 r270 top value=10u
C33 "Cap Semi" C1206 9490,4645 r0 top value=22pF
C34 "Cap Semi" C1206 9835,4655 r270 top value=22pF
C35 "Cap Semi" C1206 9655,3180 r180 top value=22pF
C36 "Cap Semi" C1206 9908.15,3180 r0 top value=22pF
C37 "Cap Semi" C1206 9675,3485 r0 top value=100nF
C38 "Cap Semi" C1206 9445,4518.15 r90 top value=100nF
C39 "Cap Semi" C1206 8988.15,3680 r180 top value=100nF
C40 "Cap Semi" C1206 10170,4015 r0 top value=100nF
C41 "10uF" UWX1C100MCL2GB 9031.93,3815 r180 top
C42 "Cap Semi" C1206 10125,3885 r90 top value=100nF
C43 "Cap Semi" C1206 10220,3886.85 r90 top value=100nF
C44 "Cap" C1206 8623.15,3160 r180 top value=10uF
C45 "Cap" C1206 8875,3160 r0 top value=10uF
C46 "Cap" C1206 10875,3786.85 r90 top value=10nF
C47 "Cap" C1206 10696.85,4030 r0 top value=47pF
C48 "Cap" C1206 10696.85,3835 r0 top value=47pF
C49 "Cap" C1206 10525,3725 r180 top value=100nF
C50 "Cap Semi" C1206 10820,3555 r180 top value=1nF
D1 "1N5819HW" 1N58XX 5530.79,4975 r180 top
D2 "1N5819HW" 1N58XX 5535,4700.79 r270 top
D3 "MMSZ5230B" ONSC-SOD-123-2-425-04_V 5145,4475 r90 top
D4 "MBRS340" MBRS340 5620,4103.46 r270 top
D5 "MBRS340" MBRS340 4793.46,3165 r180 top
D6 "1N5819HW" 1N58XX 7420.79,5013.23 r180 top
D7 "1N5819HW" 1N58XX 7425,4739.02 r270 top
D8 "MMSZ5230B" ONSC-SOD-123-2-425-04_V 7010,4513.23 r90 top
D9 "MBRS340" MBRS340 7235,4260 r270 top
D10 "MBRS340" MBRS340 6370,3220 r180 top
D11 "MBRS360" MBRS360 4110,4420 r270 top
D12 "MBRS360" MBRS360 4060,3300 r270 top
D13 "RGB LED Strip" "HEADER 1X4" 10470,5110 r0 top
J1 "Molex 43045-0402" MOLEX43045-0402 5120.94,2520.08 r0 top
J2 "Molex 43045-0402" MOLEX43045-0402 6030,2516.89 r0 top
J3 "Molex 43045-0402" MOLEX43045-0402 4481.89,2520 r0 top
J4 "Floppy Header" "HEADER 1X4 12V" 8159.96,2400 r90 top
J5 "Molex 43045-0402" MOLEX43045-0402 7550.94,2515.08 r0 top
L1 "SRR1240-4R7M" SRR1240 5160,3335 r180 top
L2 "IHLP-6767DZ-11" IHLP-6767DZ-11 7169.57,3390 r180 top
L3 "SRR1240-330M" SRR1240 3445,4355 r90 top
L4 "SRR1240-330M" SRR1240 3385,3240 r90 top
L5 "Inductor" "0806 (METRIC 2016)" 10160,4105 r0 top value=4.7uH
P1 "Header 14X2" "HEADER 2X14" 8610,4393 r270 top
P2 "Header 9X2" "HEADER 2X9" 9795,5110 r180 top
P3 "Header 10X2" "HEADER 2X10" 9090,2865 r0 top
P4 "Header 8X3" "HEADER 8X3" 10730,4460 r90 top
P5 "Header 4" "HEADER 1X4" 10290,5110 r180 top
P6 "Header 4" "HEADER 1X4" 10940,4995 r270 top
P7 "Header 4" "HEADER 1X4" 10940,4235 r90 top
P8 "FTSH-105-01-L-DV-K-TR" FTSH-105-01-L-DV-K-TR 10155,3235 r90 top
Q1 "BUK6212" NXP-SOT428_M 5700,3380.55 r270 top
Q2 "BUK6212" NXP-SOT428_M 5310,3915.55 r270 top
Q3 "BUK6212" NXP-SOT428_M 4995,3915.55 r270 top
Q4 "BUK6212" NXP-SOT428_M 4580,3475 r180 top
Q5 "BUK6212" NXP-SOT428_M 7425,3490 r270 top
Q6 "BUK6212" NXP-SOT428_M 6940,4065.55 r270 top
Q7 "BUK6212" NXP-SOT428_M 6610,4065 r270 top
Q8 "BUK6212" NXP-SOT428_M 6180,3520 r180 top
Q9 "ABS25" ABS25 9745,4600 r90 top
Q10 "ABLS" ABLS 9959.02,3330 r180 top
Q11 "DMN1019USN" DMN1019USN 10660,4905 r0 top
Q12 "DMN1019USN" DMN1019USN 10507.6,4900.51 r0 top
Q13 "DMN1019USN" DMN1019USN 10360,4900 r0 top
R1 "Res3" J1-0603 4625,4745 r90 top value=100k
R2 "Res3" J1-0603 5020,4440 r90 top value=51k
R3 "Res3" J1-0603 4915,5090 r180 top value=100k
R4 "Res3" J1-0603 4635,4845 r180 top value=100
R5 "Res3" R1206 4890,4285 r270 top value=0.018
R6 "Res3" R1206 4990,4285 r270 top value=0.018
R7 "Res3" J1-0603 4635,4955 r180 top value=100
R8 "Res3" 14-1210 5175,2780 r270 top value=6m
R9 "Res3" J1-0603 4470,4645 r270 top value=205k
R10 "Res3" J1-0603 4470,4794.53 r270 top value=20k
R11 "Res3" J1-0603 7900,3815 r180 top value=1.82K
R12 "Res3" J1-0603 6545,4780 r90 top value=100k
R13 "Res3" J1-0603 6885,4478.23 r90 top value=51k
R14 "Res3" J1-0603 6805,5128.23 r180 top value=100k
R15 "Res3" J1-0603 6525,4883.23 r180 top value=100
R16 "Res3" R1206 6510,4411.1 r270 top value=0.018
R17 "Res3" R1206 6620,4411.1 r270 top value=0.018
R18 "Res3" J1-0603 6525,4993.23 r180 top value=100
R19 "Res3" 14-1210 6085,2765 r270 top value=1m
R20 "Res3" J1-0603 6360,4683.23 r270 top value=113k
R21 "Res3" J1-0603 6360,4833.23 r270 top value=2k
R22 "Res3" J1-0603 4075,4714.53 r90 top value=392k
R23 "Res3" J1-0603 4010,4654.53 r90 top value=53.6k
R24 "Res3" J1-0603 3709.53,4855 r0 top value=41.2k
R25 "Res3" J1-0603 3950,4905 r180 top value=10k
R26 "Res3" J1-0603 3915,5000 r0 top value=464k
R27 "Res3" J1-0603 3709.53,5000 r0 top value=15.8k
R28 "Res3" J1-0603 4740,2830 r270 top value=10m
R29 "Res3" J1-0603 4010,3595 r90 top value=392k
R30 "Res3" J1-0603 3955,3535 r90 top value=53.6k
R31 "Res3" J1-0603 3660,3735 r0 top value=41.2k
R32 "Res3" J1-0603 3895,3785 r180 top value=10k
R33 "Res3" J1-0603 3855.47,3880 r0 top value=464k
R34 "Res3" J1-0603 3660,3880 r0 top value=15.8k
R35 "Res3" J1-0603 4474.41,2819.53 r270 top value=10m
R36 "Res3" J1-0603 10090,4980 r90 top value=20
R37 "Res3" J1-0603 10190,4980.47 r90 top value=20
R38 "Res3" J1-0603 10825,4895 r180 top value=20
R39 "Res3" J1-0603 10825,4795 r180 top value=20
R40 "Res3" J1-0603 9950.47,3465 r0 top value=0
R41 "Res3" J1-0603 9510,4485 r90 top value=91K
R42 "Res3" J1-0603 10805,3809.53 r270 top value=0
R43 "Res3" J1-0603 10720.47,3905 r0 top value=27
R44 "Res3" J1-0603 10720.47,3960 r180 top value=27
R45 "Res3" J1-0603 10645,3555 r180 top value=47k
R46 "Res1" J1-0603 9100,4255 r180 top value=499K
R47 "Res1" J1-0603 9100,4200 r0 top value=100k
U1 "LTC3780EG#PBF" LT-G-24_L 5021.14,4766.61 r0 top
U2 "AD8217" AD8217 5085.59,2920 r270 top
U3 "LTC3780EG#PBF" LT-G-24_L 6910,4808.23 r0 top
U4 "AD8217" AD8217 5975.59,2907.91 r270 top
U5 "LT3958EUHE#PBF" LT-UHE-36-V-UHE28MA_V 3855,4635 r0 top
U6 "AD8217" AD8217 4666.18,2920 r270 top
U7 "LT3958EUHE#PBF" LT-UHE-36-V-UHE28MA_V 3800,3515 r0 top
U8 "AD8217" AD8217 4395.59,2912.91 r270 top
U9 "MS432P401R" PZ0100A_M 9620,4030 r180 top value=Value
U10 "R-78E3.3-1.0" R-78EXX-1.0 8655,3295 r0 top
U11 "Micro USB" "MICRO USB" 11061.3,3819.02 r90 top
U12 "FT230x" FT230X 10555,4040 r270 top
V1 "I6A4W020A033V" I6A4W020A033V 7715.12,5059.21 r270 top

## Footprints (in the part's own frame and the unit in brackets; to place one, negate y for a bottom-side part, rotate by r counter-clockwise, add the part's x,y. Pads: shape width x height; smd on the part's side, far side on the other; paste and mask are expansions set on the pad)
1N58XX [mm] "1A Schottky Barrier Rectifier Diode"
  rect 1.655x1.67 smd: A(0,0) K(3.83,0)
  silkscreen extent -0.39,-1.45 4.22,1.45
14-1210 [mm] "Chip Resistor, Body 3.2x2.5mm, IPC High Density"
  rect 1.1x2.6 smd: 1(-1.35,0) 2(1.35,0)
  silkscreen extent -0.4,-1.2 0.4,1.2, body extent -1.68,-1.32 1.68,1.32, height 0.9
"0806 (METRIC 2016)" [mm] "Molded Inductor, 2-Leads, Body 2.00x1.60mm, IPC Medium Density"
  rect 1.35x1.7 smd: 1(-0.925,0) 2(0.925,0)
  body extent -1.32,-0.9 1.32,0.9, height 1
ABLS [mm] "SMD Low Profile Crystal - 3.579545 MHz to 75 MHz"
  rect 5.6x2.1 smd: 1(0,0) 2(9.5,0)
  silkscreen extent -1.02,-2.42 10.53,2.42
ABS25 [mm] "32.768 kHz Low Frequency SMD Crystal"
  rect 1.3x1.9 smd: 1(0,0) 2(5.5,0) 3(5.5,3.2) 4(0,3.2)
  silkscreen extent -1.25,-0.3 6.75,3.5
AD8217 [mm] "High Resolution, Zero-Drift Current Shunt Monitor"
  rect 1.6x0.4 smd: 1(0,0)
  oval 1.6x0.4 smd: 2(0,-0.65) 3(0,-1.3) 4(0,-1.95) 5(4.9,-1.95) 6(4.9,-1.3) 7(4.9,-0.65) 8(4.9,0)
  silkscreen extent 1.63,-2.28 3.27,0.33
C1206 [mm] "Chip Capacitor, Body 3.2x1.6mm, IPC High Density"
  rect 1.1x1.7 smd: 1(-1.35,0) 2(1.35,0)
  silkscreen extent -0.4,-0.75 0.4,0.75, body extent -1.7,-0.9 1.7,0.9, height 1.3
DMN1019USN [mm] "12V N-Channel Enhancement Mode MOSFET"
  rect 0.8x1 smd: D(0.95,2.4) G(0,0) S(1.9,0)
FT230X [mil] "USB to BASIC UART IC"
  rect 70x15 smd: 1(0,0)
  oval 70x15 smd: 2(0,-25) 3(0,-50) 4(0,-75) 5(0,-100) 6(0,-125) 7(0,-150) 8(0,-175) 9(205,-175) 10(205,-150) 11(205,-125) 12(205,-100) 13(205,-75) 14(205,-50) 15(205,-25) 16(205,0)
  silkscreen extent 70,-188 135,13
FTSH-105-01-L-DV-K-TR [mil] "CONN HEADER 10POS DUAL .05\" SMD"
  rect 150x20 smd: 1(0,0)
  oval 150x20 smd: 2(200,0) 3(0,-50) 4(200,-50) 5(0,-100) 6(200,-100) 7(0,-150) 8(200,-150) 9(0,-200) 10(200,-200)
  silkscreen extent 88,-225 112,25
"HEADER 1X4" [mil]
  rect 60x60 hole 40: 1(0,0)
  round 60 hole 40: 2(100,0) 3(200,0) 4(300,0)
  silkscreen extent -50,-50 350,50
"HEADER 1X4 12V" [mm]
  round 1.778 hole 1.25: 0(2.54,-2.16)
  round 1.528 hole 1.02: 1(0,0) 2(2.54,0) 3(5.08,0) 4(7.62,0)
"HEADER 2X9" [mil]
  rect 60x60 hole 40: 1(0,0)
  round 60 hole 40: 2(0,100) 3(100,0) 4(100,100) 5(200,0) 6(200,100) 7(300,0) 8(300,100) 9(400,0) 10(400,100) 11(500,0) 12(500,100) 13(600,0) 14(600,100) 15(700,0) 16(700,100) 17(800,0) 18(800,100)
  silkscreen extent -50,-50 850,150
"HEADER 2X10" [mil]
  rect 60x60 hole 40: 1(0,0)
  round 60 hole 40: 2(0,100) 3(100,0) 4(100,100) 5(200,0) 6(200,100) 7(300,0) 8(300,100) 9(400,0) 10(400,100) 11(500,0) 12(500,100) 13(600,0) 14(600,100) 15(700,0) 16(700,100) 17(800,0) 18(800,100) 19(900,0) 20(900,100)
  silkscreen extent -50,-50 950,150
"HEADER 2X14" [mil]
  rect 60x60 hole 40: 1(-652,-40)
  round 60 hole 40: 2(-652,60) 3(-552,-40) 4(-552,60) 5(-452,-40) 6(-452,60) 7(-352,-40) 8(-352,60) 9(-252,-40) 10(-252,60) 11(-152,-40) 12(-152,60) 13(-52,-40) 14(-52,60) 15(48,-40) 16(48,60) 17(148,-40) 18(148,60) 19(248,-40) 20(248,60) 21(348,-40) 22(348,60) 23(448,-40) 24(448,60) 25(548,-40) 26(548,60) 27(648,-40) 28(648,60)
  silkscreen extent -702,-90 698,110
"HEADER 8X3" [mil] "Connector Header Through Hole 24 position 0.1\""
  round 60 hole 40: 1(0,700) 2(100,700) 3(200,700) 4(0,600) 5(100,600) 6(200,600) 7(0,500) 8(100,500) 9(200,500) 10(0,400) 11(100,400) 12(200,400) 13(0,300) 14(100,300) 15(200,300) 16(0,200) 17(100,200) 18(200,200) 19(0,100) 20(100,100) 21(200,100) 22(0,0) 23(100,0) 24(200,0)
I6A4W020A033V [mm] "12V 250W DC/DC Converter - Input 9V to 53V - Output 3.3V to 15V @ 20A"
  round 1.908 hole 1.4: 1(0,15.2) 2(0,7.6) 3(0,0) 5(27.9,3.8) 6(27.9,7.6) 7(27.9,11.4) 32(20.3,-1.4) 33(24.1,-1.4) 34(0,11.4)
  round 2.5 hole 1.9: 4(27.9,0) 8(27.9,15.2)
  silkscreen extent -2.55,-3.85 30.45,19.05
IHLP-6767DZ-11 [mm] "15µH Shielded Molded Inductor 14A 14.4 mOhm Max Nonstandard"
  rect 3.825x12.32 smd: 1(0,0) 2(16.245,0)
  silkscreen extent -0.52,-8.57 16.77,8.57
J1-0603 [mm] "Chip Resistor, Body 1.6x0.8mm, IPC High Density"
  rect 0.7x0.9 smd: 1(-0.75,0) 2(0.75,0)
  silkscreen extent -0.2,-0.35 0.2,0.35, body extent -0.85,-0.48 0.85,0.48, height 0.9
LT-G-24_L [mm] "SOP, 24-Leads, Body 8.5x5.6mm, Pitch 0.65mm, IPC High Density"
  oval 1.8x0.45 smd: 1(-3.4,3.575) 2(-3.4,2.925) 3(-3.4,2.275) 4(-3.4,1.625) 5(-3.4,0.975) 6(-3.4,0.325) 7(-3.4,-0.325) 8(-3.4,-0.975) 9(-3.4,-1.625) 10(-3.4,-2.275) 11(-3.4,-2.925) 12(-3.4,-3.575) 13(3.4,-3.575) 14(3.4,-2.925) 15(3.4,-2.275) 16(3.4,-1.625) 17(3.4,-0.975) 18(3.4,-0.325) 19(3.4,0.325) 20(3.4,0.975) 21(3.4,1.625) 22(3.4,2.275) 23(3.4,2.925) 24(3.4,3.575)
  silkscreen extent -3.52,-4.25 2.1,4.47, body extent -2.8,-4.25 2.8,4.25, height 2
LT-UHE-36-V-UHE28MA_V [mm] "QFN, 28-Leads, Body 6x5mm, Pitch 0.5mm"
  rect 0.7x0.25 smd: 1(-2.4,2.25) 2(-2.4,1.75) 3(-2.4,1.25) 4(-2.4,0.75) 6(-2.4,-0.25) 8(-2.4,-1.25) 9(-2.4,-1.75) 10(-2.4,-2.25) 20(2.4,-1.75) 21(2.4,-1.25) 23(2.4,-0.25) 24(2.4,0.25) 25(2.4,0.75) 27(2.4,1.75) 28(2.4,2.25)
  rect 0.25x0.7 smd: 12(-1.25,-2.9) 13(-0.75,-2.9) 14(-0.25,-2.9) 15(0.25,-2.9) 16(0.75,-2.9) 17(1.25,-2.9) 30(1.25,2.9) 31(0.75,2.9) 32(0.25,2.9) 33(-0.25,2.9) 34(-0.75,2.9) 35(-1.25,2.9) 36(-1.75,2.9)
  rect 3x1.88 smd: 37(0,1.06)
  rect 3x1.53 smd: 38(0,-1.245)
  silkscreen extent -3.27,-3 2.5,3, body extent -2.5,-3 2.5,3, height 0.8
MBRS340 [mm] "Schottky Rectifier"
  rect 2.6x3.2 smd: A(0,0) K(7.2,0)
  silkscreen extent 0.02,-3.13 7.17,3.13
MBRS360 [mm] "Molded Diode, 2-Leads, Body 6.88x5.90mm, IPC Medium Density"
  rect 2.5x3.15 smd: 1(-2.8,0) 2(2.8,0)
  silkscreen extent -3.6,-3.15 4.37,3.15, body extent -3.57,-3.13 3.58,3.13, height 2.6
"MICRO USB" [mm] "USB - micro B USB 2.0 Receptacle Connector 5 Position Surface Mount, Right Angle"
  round 0 hole 0.6 slot 1.3 at 90 deg unplated: 0(-0.3,0) 0(6.7,0)
  rect 1.8x1.9 smd: 0(0,0) 0(6.4,0)
  round 1.45 hole 0.85: 0(0.7,2.7) 0(5.7,2.7)
  rect 1.5x1.9 smd: 0(2.2,0) 0(4.2,0)
  rect 0.4x1.35 smd: 1(1.9,2.7) 2(2.55,2.7) 3(3.2,2.7) 4(3.85,2.7) 5(4.5,2.7)
MOLEX43045-0402 [mm] "43045-0402"
  round 4 hole 3 unplated: 0(1.5,-4.32)
  round 1.7 hole 1.02: 1(3,0) 2(0,0) 3(3,3) 4(0,3)
  body extent -3.57,-8.95 6.58,3.29, height 8.83
NXP-SOT428_M [mm] "DPAK, 3-Leads, Body 6.75x6.22mm, Pitch 2.29mm, IPC Low Density"
  rect 7.1x5.6 smd: D(2.3,0)
  rect 1.95x1.05 smd: G(-4.8,2.29) S(-4.8,-2.29)
  silkscreen extent -4.92,-3.35 -1.65,3.49, body extent -1.8,-3.37 4.42,3.37, height 2.38
ONSC-SOD-123-2-425-04_V [mm] "SOD, 2-Leads, Body 2.69x1.6mm"
  rect 0.91x1.22 smd: 1(-1.635,0) 2(1.635,0)
  silkscreen extent -1.76,-0.8 0.78,1.28, body extent -1.35,-0.8 1.35,0.8, height 1.35
PCVXXXXXMCLXGS [mm] "Aluminum Electrolytic Capacitor, Body 10.30x10.30x12.70mm, IPC Low Density"
  rect 4.45x2.35 smd: 1(-4.4,0) 2(4.4,0)
  silkscreen extent -5.25,-5.25 5.25,5.25, body extent -5.25,-5.25 5.25,5.25, height 12.7
"PUSH BUTTON" [mm] "Tactile Switch SPST-NO Top Actuated Through Hole"
  round 1.808 hole 1.3: 1(12.5,0) 2(0,0) 3(12.5,5) 4(0,5)
  silkscreen extent 0.25,-3.5 12.25,8.5
PZ0100A_M [mm] "SimpleLink Ultra-Low-Power 32-Bit ARM Cortex-M4F MCU With Precision ADC, 256KB Flash and 64KB RAM"
  oval 2.05x0.3 smd paste+0 mask+0.051: 1(-7.625,6) 2(-7.625,5.5) 3(-7.625,5) 4(-7.625,4.5) 5(-7.625,4) 6(-7.625,3.5) 7(-7.625,3) 8(-7.625,2.5) 9(-7.625,2) 10(-7.625,1.5) 11(-7.625,1) 12(-7.625,0.5) 13(-7.625,0) 14(-7.625,-0.5) 15(-7.625,-1) 16(-7.625,-1.5) 17(-7.625,-2) 18(-7.625,-2.5) 19(-7.625,-3) 20(-7.625,-3.5) 21(-7.625,-4) 22(-7.625,-4.5) 23(-7.625,-5) 24(-7.625,-5.5) 25(-7.625,-6) 51(7.625,-6) 52(7.625,-5.5) 53(7.625,-5) 54(7.625,-4.5) 55(7.625,-4) 56(7.625,-3.5) 57(7.625,-3) 58(7.625,-2.5) 59(7.625,-2) 60(7.625,-1.5) 61(7.625,-1) 62(7.625,-0.5) 63(7.625,0) 64(7.625,0.5) 65(7.625,1) 66(7.625,1.5) 67(7.625,2) 68(7.625,2.5) 69(7.625,3) 70(7.625,3.5) 71(7.625,4) 72(7.625,4.5) 73(7.625,5) 74(7.625,5.5) 75(7.625,6)
  oval 0.3x2.05 smd paste+0 mask+0.051: 26(-6,-7.625) 27(-5.5,-7.625) 28(-5,-7.625) 29(-4.5,-7.625) 30(-4,-7.625) 31(-3.5,-7.625) 32(-3,-7.625) 33(-2.5,-7.625) 34(-2,-7.625) 35(-1.5,-7.625) 36(-1,-7.625) 37(-0.5,-7.625) 38(0,-7.625) 39(0.5,-7.625) 40(1,-7.625) 41(1.5,-7.625) 42(2,-7.625) 43(2.5,-7.625) 44(3,-7.625) 45(3.5,-7.625) 46(4,-7.625) 47(4.5,-7.625) 48(5,-7.625) 49(5.5,-7.625) 50(6,-7.625) 76(6,7.625) 77(5.5,7.625) 78(5,7.625) 79(4.5,7.625) 80(4,7.625) 81(3.5,7.625) 82(3,7.625) 83(2.5,7.625) 84(2,7.625) 85(1.5,7.625) 86(1,7.625) 87(0.5,7.625) 88(0,7.625) 89(-0.5,7.625) 90(-1,7.625) 91(-1.5,7.625) 92(-2,7.625) 93(-2.5,7.625) 94(-3,7.625) 95(-3.5,7.625) 96(-4,7.625) 97(-4.5,7.625) 98(-5,7.625) 99(-5.5,7.625) 100(-6,7.625)
  silkscreen extent -7.75,-6.2 6.2,6.82, body extent -8,-8 8.02,8.02, height 1.5
R1206 [mm] "Chip Resistor, 2-Leads, Body 3.10x1.60mm, IPC Medium Density"
  rect 1.05x1.7 smd: 1(-1.425,0) 2(1.425,0)
  silkscreen extent -0.5,-0.75 0.5,0.75, body extent -1.6,-0.85 1.6,0.85, height 0.65
R-78EXX-1.0 [mm] "1A DC/DC Voltage Converter"
  round 1.608 hole 1.1: 1(0,0) 2(2.54,0) 3(5.08,0)
  silkscreen extent -3.26,-2 8.34,6.5
SRR1240 [mm] "Molded Inductor, 2-Leads, Body 12.50x12.50mm, IPC Medium Density"
  rect 3.7x5.2 smd: 1(-5.05,0) 2(5.05,0)
  silkscreen extent -6.45,-6.45 6.45,6.45, body extent -6.4,-6.4 6.4,6.4, height 4.5
UWX1C100MCL2GB [mm] "Aluminum Electrolytic Capacitor, Body 3.30x3.30x5.50mm, IPC Low Density"
  rect 2.65x1.85 smd: 1(-1.475,0) 2(1.475,0)
  silkscreen extent -1.75,-1.75 1.75,1.75, body extent -1.75,-1.75 1.75,1.75, height 5.5

## Part data
B1: "Tactile Switch SPST-NO Top Actuated Through Hole", Digikey Link=https://www.digikey.com/product-detail/en/te-connectivity-alcoswitch-switches/FSM101/450-1157-ND/701084, Drawing=https://www.te.com/commerce/DocumentDelivery/DDEController?Action=srchrtrv&DocNm=1571140&DocType=Customer+Drawing&DocLang=English
C1 C2 C3 C4 C5 C6 C7 C8 C9 C10 C11 C13 C14 C15 C16 C17 C18 C19 C20 C21 C22 C23 C25 C26 C27 C28 C29 C30 C31 C32 C33 C34 C35 C36 C37 C38 C39 C40 C42 C43: "Capacitor (Semiconductor SIM Model)", LatestRevisionDate=29-May-2009, LatestRevisionNote="IPC-7351 Footprint Added.", PackageDescription="Chip Capacitor", PackageReference=C1206, Published=8-Jun-2000, Publisher="Altium Limited"
C12 C24: library part PCV1E391MCL2GS, "CAP ALUM POLY 390UF 20% 25V SMD", Datasheet=http://nichicon-us.com/english/products/pdfs/e-pcv.pdf, Digikey=https://www.digikey.com/product-detail/en/nichicon/PCV1E391MCL2GS/493-4544-1-ND/2786841
C41: library part UWX1C100MCL2GB, "CAP ALUM 10UF 20% 16V SMD", Datasheet=http://nichicon-us.com/english/products/pdfs/e-uwx.pdf, Digikey=https://www.digikey.com/product-detail/en/nichicon/UWX1C100MCL2GB/493-2099-1-ND/590074
C44 C45: "Capacitor", Supplier Part Number 1=1276-2872-1-ND, LatestRevisionDate=17-Jul-2002, LatestRevisionNote="Re-released for DXP Platform.", PackageDescription="Radial Cap, Thru-Hole; 2 Leads; 0.3 in Pin Spacing", PackageReference=RAD-0.3, Published=8-Jun-2000, Publisher="Altium Limited", Supplier 1=Digi-Key
C46: "Capacitor", Supplier Part Number 1=1276-1921-1-ND, LatestRevisionDate=17-Jul-2002, LatestRevisionNote="Re-released for DXP Platform.", PackageDescription="Radial Cap, Thru-Hole; 2 Leads; 0.3 in Pin Spacing", PackageReference=RAD-0.3, Published=8-Jun-2000, Publisher="Altium Limited", Supplier 1=Digi-Key
C47 C48: "Capacitor", Supplier Part Number 1=490-16375-1-ND, LatestRevisionDate=17-Jul-2002, LatestRevisionNote="Re-released for DXP Platform.", PackageDescription="Radial Cap, Thru-Hole; 2 Leads; 0.3 in Pin Spacing", PackageReference=RAD-0.3, Published=8-Jun-2000, Publisher="Altium Limited", Supplier 1=Digi-Key
C49: "Capacitor", Supplier Part Number 1=1276-1001-1-ND, LatestRevisionDate=17-Jul-2002, LatestRevisionNote="Re-released for DXP Platform.", PackageDescription="Radial Cap, Thru-Hole; 2 Leads; 0.3 in Pin Spacing", PackageReference=RAD-0.3, Published=8-Jun-2000, Publisher="Altium Limited", Supplier 1=Digi-Key
C50: "Capacitor (Semiconductor SIM Model)", Supplier Part Number 1=490-4761-1-ND, LatestRevisionDate=29-May-2009, LatestRevisionNote="IPC-7351 Footprint Added.", PackageDescription="Chip Capacitor", PackageReference=C1206, Published=8-Jun-2000, Publisher="Altium Limited", Supplier 1=Digi-Key
D1 D2 D6 D7: library part 1N58xx, "1A Schottky Barrier Rectifier Diode", Datasheet=http://www.kesenes.com/pdf/1n5817-1n5819.pdf
D3 D8: library part MMSZ5230BT1G, "Zener Voltage Regulator, 500 mW, 2-Pin SOD-123, Pb-Free, Tape and Reel", Manufacturer="On Semiconductor", Supplier Part Number 1=MMSZ5230BT1GOSTR-ND, ComponentLink1Description="Manufacturer URL", ComponentLink1URL=http://www.onsemi.com/, ComponentLink2Description=Datasheet, ComponentLink2URL=http://www.onsemi.com/pub_link/Collateral/MMSZ5221BT1-D.PDF, ComponentLink3Description="Package Specification", ComponentLink3URL=http://www.onsemi.com/pub_link/Collateral/425-04.PDF, DatasheetVersion="Rev. 12", Mounting Technology="Surface Mount", PackageDescription="2-Pin SOD, Body 1.6 x 2.69 mm", PackageReference=SOD-123-2-425-04, PackageVersion="Rev. G, 10/2009", Packing="Tape and Reel", PartNumber=MMSZ5230BT1G, P Max (W)=0.5, RoHS=Pb-Free, Supplier 1=Digi-Key, Supplier 2=Digi-Key, Supplier 3=Digi-Key, Supplier 4=Farnell, Supplier 5=Farnell, Supplier 6=Farnell, Supplier 7=Newark, Supplier 8=Newark, Supplier 9=Mouser, Supplier Part Number 2=MMSZ5230BT1GOSCT-ND, Supplier Part Number 3=MMSZ5230BT1GOSDKR-ND, Supplier Part Number 4=1431272, Supplier Part Number 5=1431272RL, Supplier Part Number 6=2370826, Supplier Part Number 7=83H7423, Supplier Part Number 8=67R1368, Supplier Part Number 9=863-MMSZ5230BT1G, VZ Typ (V)=4.7
D4 D5 D9 D10: "Schottky Rectifier", Datasheet=https://www.mouser.com/ds/2/308/MBRS340-1120985.pdf
D11 D12: "DIODE SCHOTTKY 60V 3A SMC", Datasheet=https://www.onsemi.com/pub/Collateral/MBRS360T3-D.PDF, Digikey=https://www.digikey.com/product-detail/en/on-semiconductor/MBRS360T3G/MBRS360T3GOSCT-ND/918010
D13: "LED RGB Strip - Bare Nonaddressable", Sparkfun Link=https://www.sparkfun.com/products/12021
J1 J2 J3 J4 J5: library part Molex43045-0402, "Micro-Fit 3.0 Right Angle Header, 3.00mm Pitch, Dual Row, 4 Circuits, with Snap-in Plastic Peg PCB Lock, Gold, Glow Wire Capable, Black", ComponentLink1Description="Molex Website", ComponentLink1URL=https://www.molex.com/molex/products/datasheet.jsp?part=active/0430450402_PCB_HEADERS.xml
L1: library part SRR1240, "FIXED IND 4.7UH 6A 18 MOHM SMD", Datasheet=https://www.bourns.com/docs/Product-Datasheets/SRR1240.pdf, Digikey=https://www.digikey.com/product-detail/en/bourns-inc/SRR1240-4R7M/SRR1240-4R7MCT-ND/2127398
L2: "15µH Shielded Molded Inductor 14A 14.4 mOhm Max Nonstandard", Datasheet=http://www.vishay.com/docs/34306/lp67dz11.pdf, Digikey=https://www.digikey.com/product-detail/en/vishay-dale/IHLP6767GZER150M11/541-1287-1-ND/2139413
L3 L4: library part SRR1240, "FIXED IND 33UH 2.3A 97 MOHM SMD", Datasheet=https://www.bourns.com/docs/Product-Datasheets/SRR1240.pdf, Digikey=https://www.digikey.com/product-detail/en/bourns-inc/SRR1240-330M/SRR1240-330MCT-ND/2127395
L5: Supplier Part Number 1=732-2956-1-ND, Code_IEC=1005, Code_JEITA=0402, LatestRevisionDate=29-May-2009, LatestRevisionNote="IPC-7351 Footprint Added.", PackageDescription="Chip Inductor", PackageReference=0402-A, Published=8-Jun-2000, Publisher="Altium Limited", Supplier 1=Digi-Key
P1: "Header, 14-Pin, Dual row", LatestRevisionDate=17-Jul-2002, LatestRevisionNote="Re-released for DXP Platform.", Publisher="Altium Limited"
P2: "Header, 9-Pin, Dual row", LatestRevisionDate=17-Jul-2002, LatestRevisionNote="Re-released for DXP Platform.", Publisher="Altium Limited"
P3: "Header, 10-Pin, Dual row", LatestRevisionDate=17-Jul-2002, LatestRevisionNote="Re-released for DXP Platform.", Publisher="Altium Limited"
P4: library part "Header 8X3 (2mm)", "Connector Header Through Hole 24 position 0.079\" (2.00mm)", Digikey=https://www.digikey.com/product-detail/en/samtec-inc/TMMH-108-01-T-T/SAM12190-ND/6692344, Drawing=http://suddendocs.samtec.com/prints/tmmh-1xx-xx-xx-x-xxx-mkt.pdf
P5 P6 P7: "Header, 4-Pin", LatestRevisionDate=17-Jul-2002, LatestRevisionNote="Re-released for DXP Platform.", Publisher="Altium Limited"